# Allegro board SIMPLEBOARD.brd
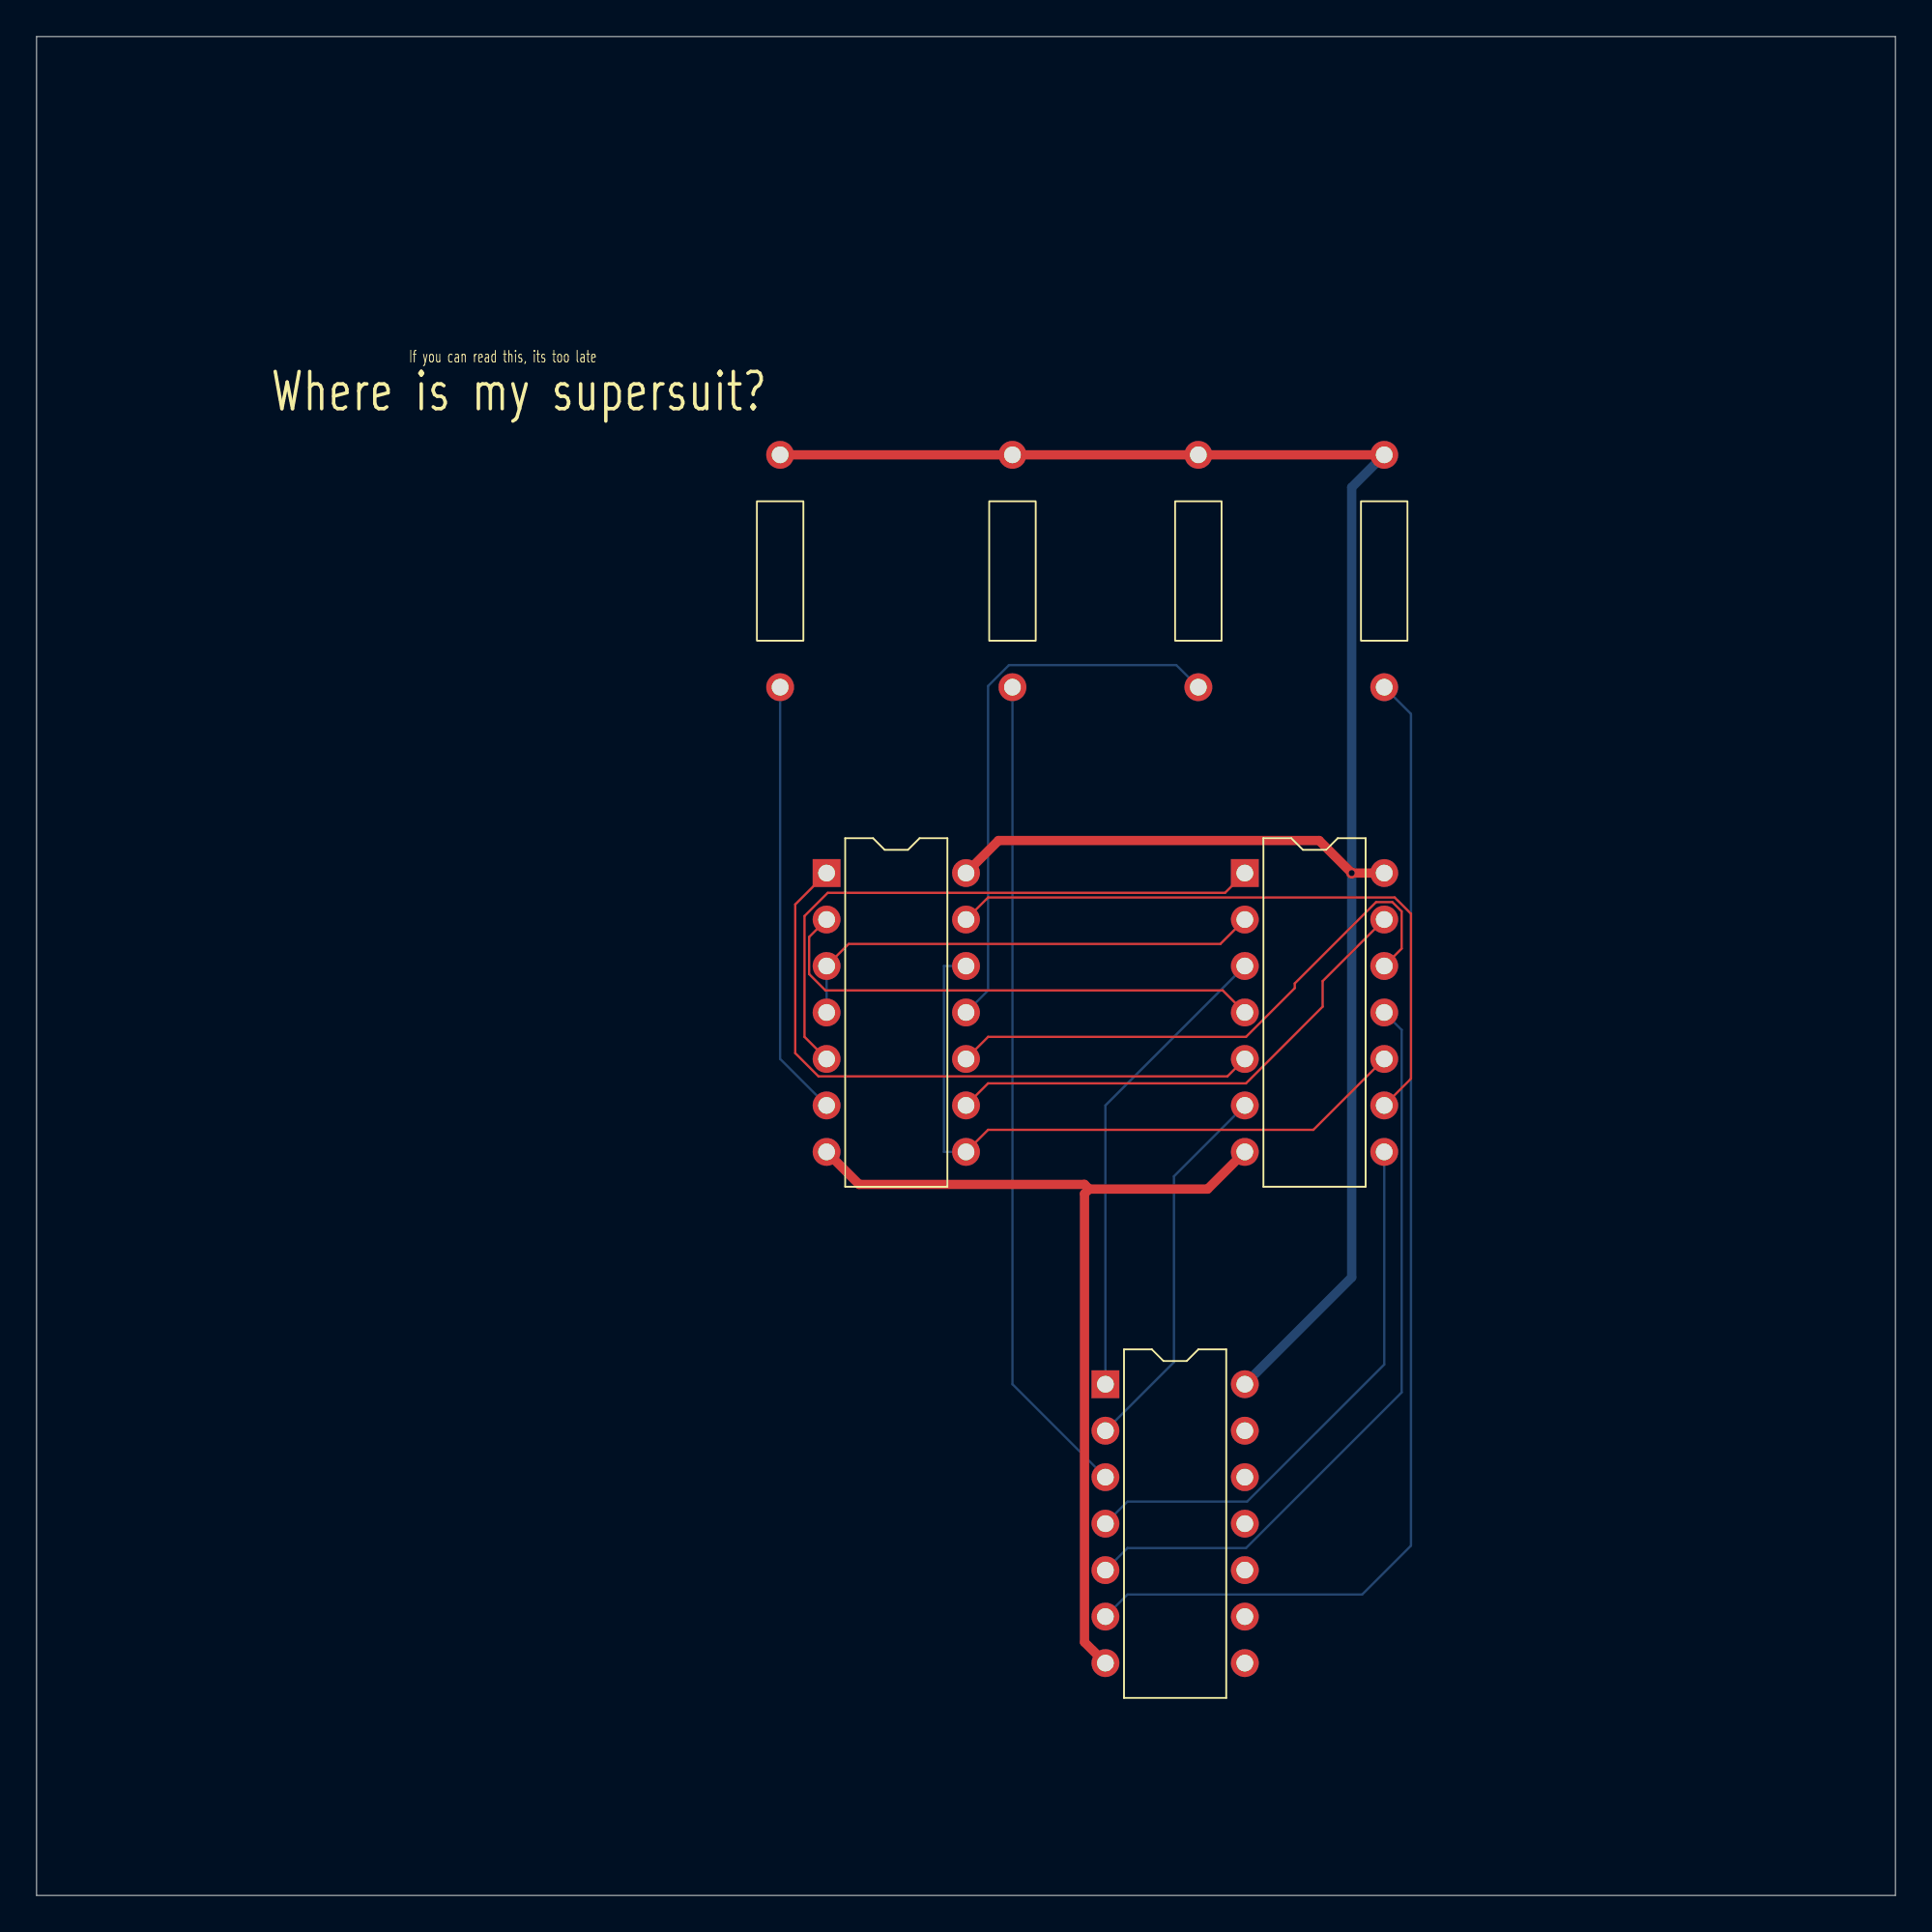
[diagram p0: board, top side]
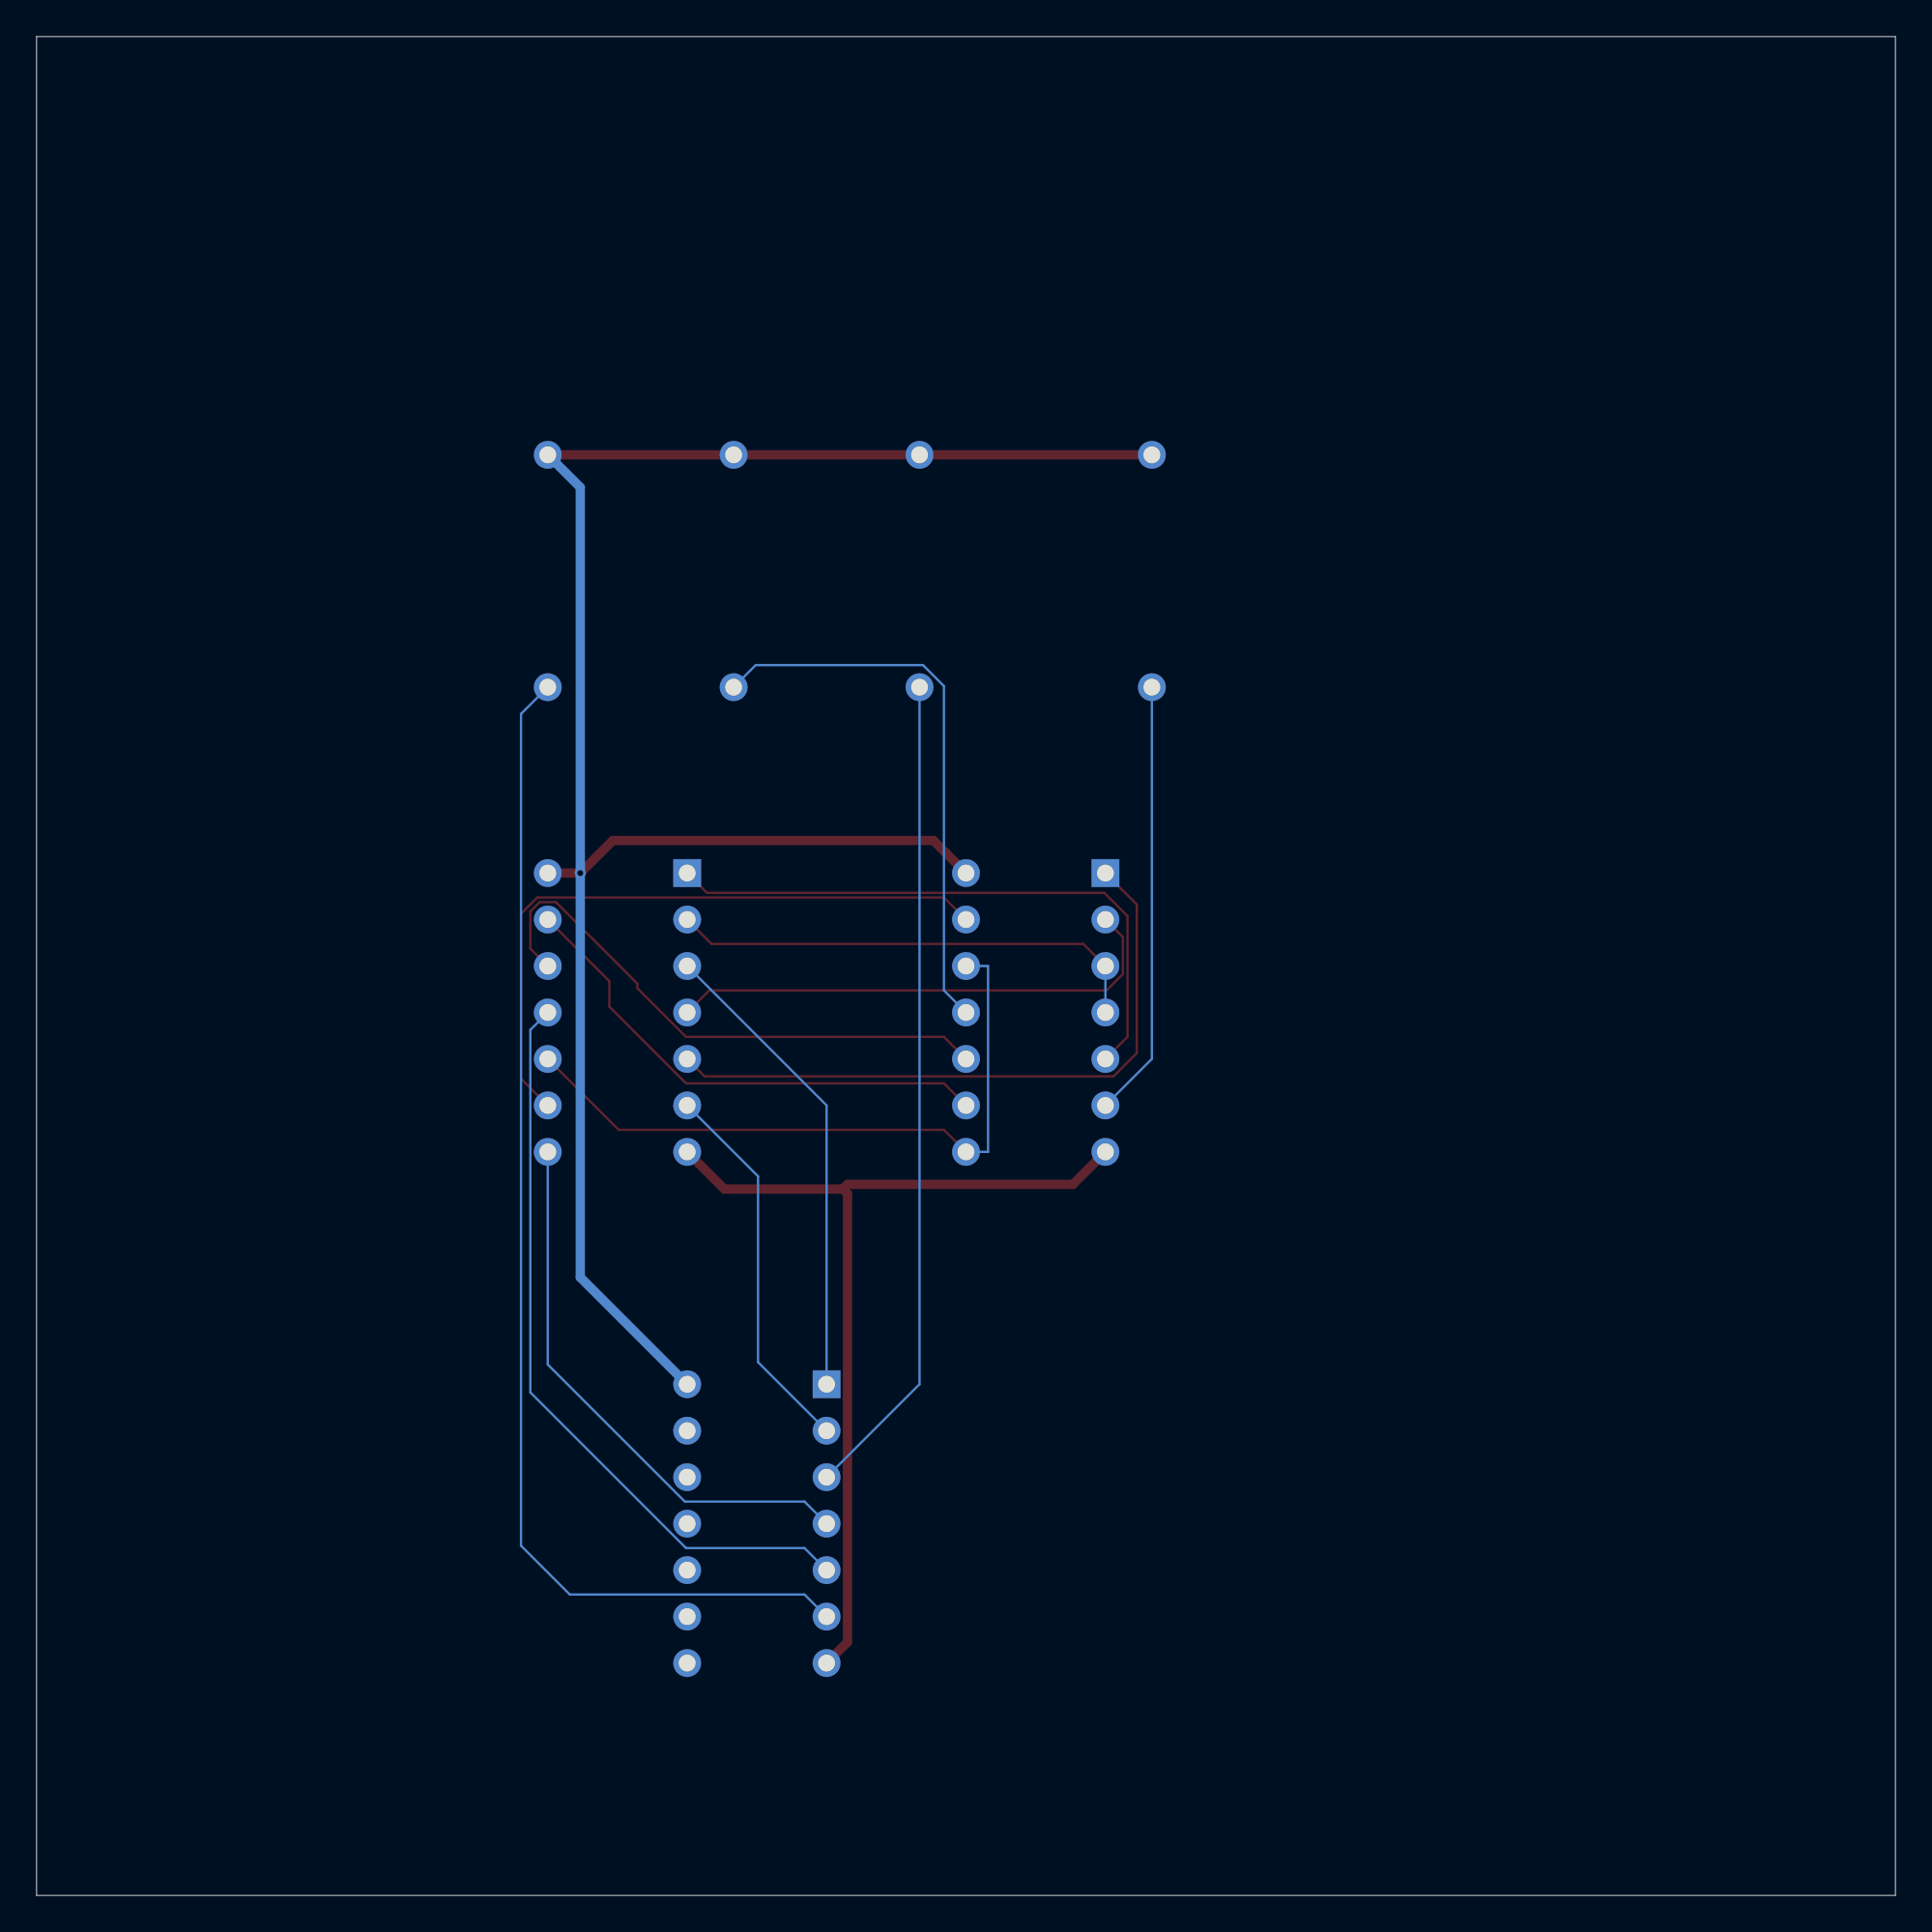
[diagram p1: board, bottom side, seen from below]

Outline 101.6 x 101.6 mm; copper layers: TOP, BOTTOM. Coordinates in mm from the lower left corner of the outline.
Outline path: 0,101.6 0,0 101.6,0 101.6,101.6 0,101.6

## Design rules (mm)
constraint set DEFAULT: min track width 0.127
nets with their own width: min track width 0.508; nets GND VCC

## Placement (name value [footprint] x y rotation side)
R1  1K  [RES500]  40.64 78.74 0 top
R2  1K  [RES500]  53.34 78.74 0 top
R3  1K  [RES500]  63.5 78.74 0 top
R4  1K  [RES500]  73.66 78.74 0 top
U1  7486  [DIP14_3]  43.18 55.88 0 top
U2  7408  [DIP14_3]  66.04 55.88 0 top
U3  7432  [DIP14_3]  58.42 27.94 0 top

## Library data of the parts
R1-R4 = PULLUP_1k: Tolerance: ***; User Part Number: ***
U1 = 7486: Tolerance: ***; User Part Number: ***
U2 = 7408: Tolerance: ***; User Part Number: ***
U3 = 7432: Tolerance: ***; User Part Number: ***

## Footprints (pads in the part's own frame, mm; a bottom-side part is the same pattern mirrored in y, then rotated)
DIP14_3
  rect 1.524x1.524 hole 0.914: 1(0,0)
  round 1.524 hole 0.914: 2(0,-2.54) 3(0,-5.08) 4(0,-7.62) 5(0,-10.16) 6(0,-12.7) 7(0,-15.24) 8(7.62,-15.24) 9(7.62,-12.7) 10(7.62,-10.16) 11(7.62,-7.62) 12(7.62,-5.08) 13(7.62,-2.54) 14(7.62,0)
RES500
  round 1.524 hole 0.914: 1(0,-12.7) 2(0,0)

## Nets
GND: U1.7 U2.7 U3.7
VCC: R1.2 R2.2 R3.2 R4.2 U1.14 U2.14 U3.14
A: U1.9 U2.13
B: U1.10 U2.12
B1: U1.1 U2.5
B2: U1.2 U2.4
CIN: U1.13 U2.9
CIN2: U1.5 U2.1
Z1: R1.1 U1.6
Z2: R2.1 U3.3
Z3: R3.1 U1.11(Y)
Z4: R4.1 U3.6
N00342: U2.8 U3.4
N00349: U2.11(Y) U3.5
N00364: U1.8 U1.12 U2.10
N00994: U1.3 U1.4 U2.2
N01138: U2.3 U3.1
N01186: U2.6 U3.2

Pads without a net: U3 8 9 10 11 12 13

## Via types
v1: diameter 0.61, hole 0.33, TOP to BOTTOM, 1 via

## Routing (per net, layer and track width the routed paths; a pad name or vN(x,y) marks a point on that pad's centre or on a via; arc(x,y) is an arc through that point)
GND: length 51
  TOP w0.508: U2.7 64.01,38.61 57.53,38.61 ; U3.7 57.28,13.84 57.28,38.35 57.53,38.61 ; 57.53,38.61 57.28,38.86 44.96,38.86 U1.7
VCC: length 111.3
  TOP w0.508: R4.2 R3.2 R2.2 R1.2 ; U2.14 v1(71.88,55.88) 70.1,57.66 52.58,57.66 U1.14
  BOTTOM w0.508: U3.14 71.88,33.78 v1(71.88,55.88) 71.88,76.96 R4.2
A: length 27.9
  TOP w0.127: U2.13 70.29,49.97 70.29,48.58 66.1,44.39 52.01,44.39 U1.9
B: length 31.1
  TOP w0.127: U2.12 74.61,51.75 74.61,53.78 74.1,54.29 73.22,54.29 68.77,49.85 68.77,49.59 66.1,46.93 52.01,46.93 U1.10
B1: length 36
  TOP w0.127: U1.1 41.47,54.17 41.47,46.04 42.74,44.77 65.09,44.77 U2.5
B2: length 28.1
  TOP w0.127: U2.4 64.83,49.47 43.12,49.47 42.23,50.36 42.23,52.39 U1.2
CIN: length 36.3
  TOP w0.127: U2.9 75.12,44.64 75.12,53.66 74.23,54.55 52.01,54.55 U1.13
CIN2: length 33.3
  TOP w0.127: U2.1 64.96,54.8 43.24,54.8 41.97,53.53 41.97,46.93 U1.5
Z1: length 23.9
  BOTTOM w0.127: R1.1 40.64,45.72 U1.6
Z2: length 45.3
  BOTTOM w0.127: R2.1 53.34,27.94 U3.3
Z3: length 30.8
  BOTTOM w0.127: U1.11 52.01,49.47 52.01,66.1 53.15,67.25 62.29,67.25 R3.1
Z4: length 65.8
  BOTTOM w0.127: U3.6 59.63,16.45 72.45,16.45 75.12,19.11 75.12,64.58 R4.1
N00342: length 30.5
  BOTTOM w0.127: U3.4 59.63,21.53 66.17,21.53 73.66,29.02 U2.8
N00349: length 41.4
  BOTTOM w0.127: U2.11 74.61,47.31 74.61,27.5 66.1,18.99 59.63,18.99 U3.5
N00364: length 37.5
  TOP w0.127: U1.8 52.01,41.85 69.79,41.85 U2.10
  BOTTOM w0.127: U1.12 49.59,50.8 49.59,40.64 U1.8
N00994: length 26.5
  TOP w0.127: U1.3 44.39,52.01 64.71,52.01 U2.2
  BOTTOM w0.127: U1.4 U1.3
N01138: length 26
  BOTTOM w0.127: U3.1 58.42,43.18 U2.3
N01186: length 20.9
  BOTTOM w0.127: U3.2 62.17,29.15 62.17,39.31 U2.6

## Text on the board
Ref Des/Silkscreen Top: If you can read this, its too late | Where is my supersuit?
